# Altium PCB LeftBar1.PcbDoc
Units mil, origin at the board's own origin, x right, y up, seen from the top; angles counter-clockwise.
Board outline 11815 x 1400.01 mil, 2 copper layers (Top Layer, Bottom Layer); 10 components, 12 nets, 68 pads, 11 vias.
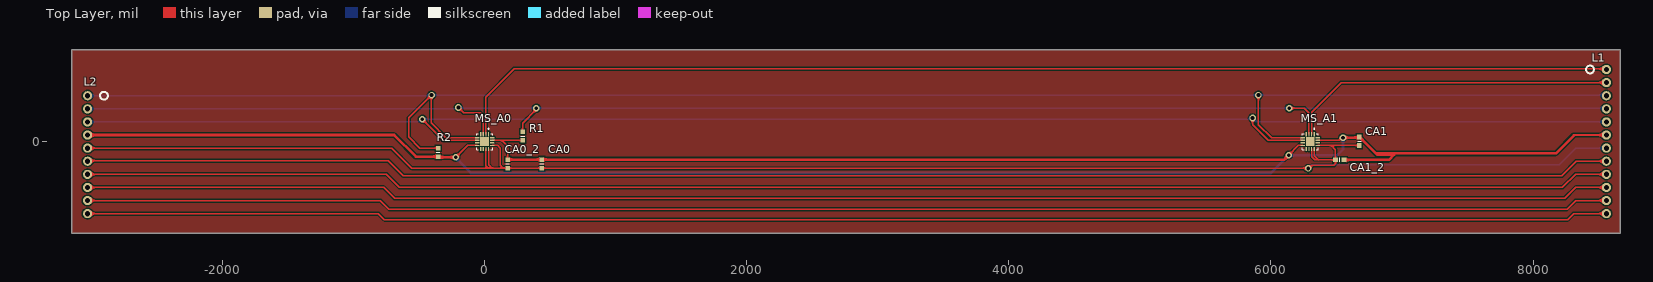
[diagram p0: Top Layer view]
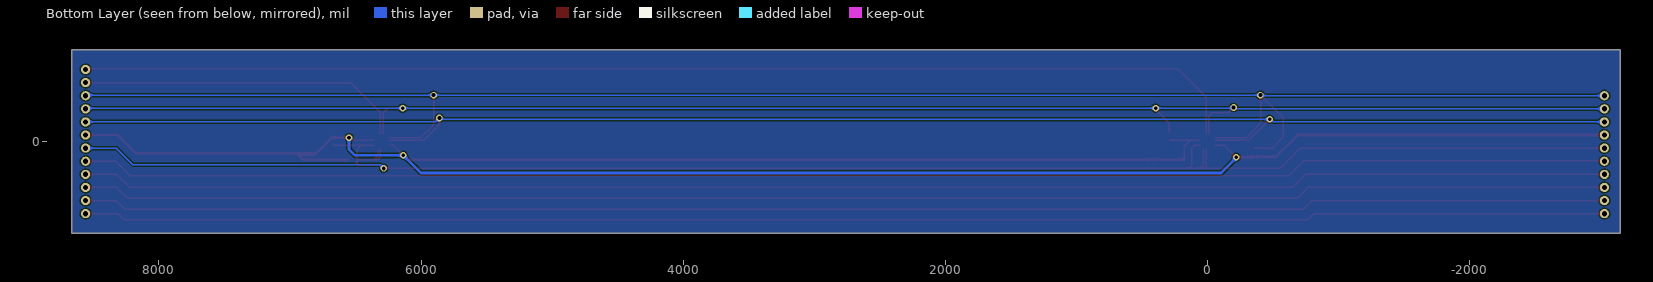
[diagram p1: Bottom Layer view, seen from below]
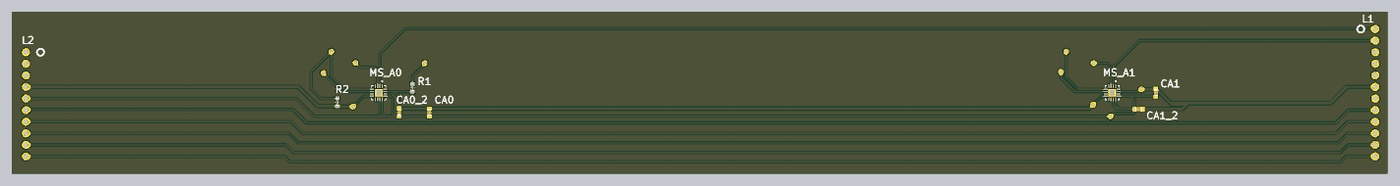
[diagram p2: 3D render of the assembled board from above, using the file's embedded part models]

## Layer stack, top to bottom
Top Solder: solder mask 0.4, Solder Resist, Dk 3.5
Top Layer: signal copper 1.4
Dielectric 1: dielectric 12.6, FR-4, Dk 4.8
Bottom Layer: signal copper 1.4
Bottom Solder: solder mask 0.4, Solder Resist, Dk 3.5

## Board outline
-3150,-700 -3150,700 8665,700 8665,-700 8665,-700.01

## Design rules (kind name [scope] priority, off if disabled: settings)
Clearance [All] p1: gap=10 ignorepadtopadclearanceinfootprint=FALSE except(0: Arc-Hole Track-Hole SMDPad-Hole THPad-Hole Via-Hole Fill-Hole Poly-Hole Region-Hole Text-Hole)
PolygonConnect [All] p1: connectstyle=Relief reliefconductorwidth=10 reliefentries=4 polygonreliefangle="90 Angle" airgapwidth=10
RoutingVias [All] p1: holewidth=28 width=50 viastyle="Through Hole" minholewidth=28 minwidth=50 maxholewidth=28 maxwidth=50
SolderMaskExpansion [All] p1: expansion=4 istentingtop=FALSE
Width [All] p1: maxlimit=20 minlimit=15 preferedwidth=15
30 further rules are at their usual default settings.

## Components (designator, comment, footprint, x,y, rotation, side; value= is the part's Value field where it differs from the comment)
CA0 "0.1uF" CAP_0603 435,-170 r90 top
CA0_2 "0.1uF" CAP_0603 175,-170 r270 top
CA1 "0.1uF" CAP_0603 6675,2.5 r90 top
CA1_2 "0.1uF" CAP_0603 6525,-140 r180 top
L1 "PIN_left" PIN_LEFT 8560,50 r0 top (schematic designator CON_L_1)
L2 "PIN_left_2" PIN_LEFT_2 -3030,-150 r0 top (schematic designator CON_L_2)
MS_A0 "MLX90393SLW ABA 011 RE" MLX90393 0,0 r270 top
MS_A1 "MLX90393SLW ABA 011 RE" MLX90393 6300,0 r270 top
R1 "10k" RES_0603 290,42.5 r270 top
R2 "10k" RES_0603 -355,-82.5 r270 top

## Footprints (in the part's own frame and the unit in brackets; to place one, negate y for a bottom-side part, rotate by r counter-clockwise, add the part's x,y. Pads: shape width x height; smd on the part's side, far side on the other; paste and mask are expansions set on the pad)
CAP_0603 [mil]
  rect 35x35 smd: 1(-32.5,0) 2(32.5,0)
  silkscreen extent 0,-16 0,14, body extent -53,-18 49,21, height 35
MLX90393 [mm]
  rrect25% 0.86x0.26 smd: 1(-1.435,0.75) 2(-1.435,0.25) 3(-1.435,-0.25) 4(-1.435,-0.75) 9(1.435,-0.75) 10(1.435,-0.25) 11(1.435,0.25) 12(1.435,0.75)
  rrect25% 0.26x0.86 smd: 5(-0.75,-1.435) 6(-0.25,-1.435) 7(0.25,-1.435) 8(0.75,-1.435) 13(0.75,1.435) 14(0.25,1.435) 15(-0.25,1.435) 16(-0.75,1.435)
  rect 1.71x1.71 smd paste-2: 17(0,0)
  silkscreen extent -2.59,-1.55 1.55,1.55
PIN_LEFT [mil]
  round 70 hole 40: 1(0,500) 2(0,400) 3(0,300) 4(0,200) 5(0,100) 6(0,0) 7(0,-100) 8(0,-200) 9(0,-300) 10(0,-400) 11(0,-500) 12(0,-600)
  silkscreen extent -155,470 -95,530
PIN_LEFT_2 [mil]
  round 70 hole 40: 1(0,500) 2(0,400) 3(0,300) 4(0,200) 5(0,100) 6(0,0) 7(0,-100) 8(0,-200) 9(0,-300) 10(0,-400)
  silkscreen extent 95,470 155,530
RES_0603 [mil]
  rect 35x35 smd: 1(-32.5,0) 2(32.5,0)
  silkscreen extent 0,-16 0,14, body extent -34,-16 29,16, height 18

## Part data
CA0 CA0_2 CA1 CA1_2: library part CAP, "Capacitance"
MS_A0 MS_A1: "MLX90393 Sensor"
R1 R2: library part RES, "Resistance"

## Via types
v1: diameter 50, hole 28, Top Layer to Bottom Layer, 11 vias

## Nets (pads, with @x,y where several pads share a name; then routed paths per layer and width w, separated by ;. In a path a pad name is that pad's centre, name@x,y a point inside that pad or via, vN(x,y) a via of type N, cw(c..) or ccw(c..) an arc to the next point about the centre after c; other vN are vias at no path point)
16: L1.12 L2.10 | length 11627.3
  Top Layer w10: L2.10 -2930,-550 -810,-550 -765,-595 8265,-595 8310,-550 L1.12
A0: L1.1 MS_A0.2 | length 8922.6
  Top Layer w10: MS_A0.2 9.84,339.84 225,555 L1.1@8560,555
A1: L1.2 MS_A1.2 | length 2511.8
  Top Layer w10: MS_A1.2 6309.84,224.84 6535,450 8205,450 L1.2
A2: L1.8 L2.6 | length 11683.2
  Top Layer w10: L2.6@-3030,-145 -735,-145 -620,-260 8220,-260 8330,-150 L1.8
A3: L1.9 L2.7 | length 11672.8
  Top Layer w10: L2.7 -2930,-250 -750,-250 -650,-350 8225,-350 8325,-250 L1.9
A4: L1.10 L2.8 | length 11658.3
  Top Layer w10: L2.8 -2930,-350 -770,-350 -687.5,-432.5 8242.5,-432.5 8325,-350 L1.10
A5: L1.11 L2.9 | length 11643.8
  Top Layer w10: L2.9 -2930,-450 -795,-450 -730,-515 8260,-515 8325,-450 L1.11
GND: CA0.1 CA0_2.2 CA1.1 CA1_2.2 L1.7 L2.5 MS_A0.11 MS_A0.12 MS_A0.13 MS_A1.11 MS_A1.12 MS_A1.13 | length 13304.2
  Top Layer w10: L2.5 -710,-50 -557.5,-202.5 27.5,-202.5 ; MS_A0.11 9.84,-184.84 27.5,-202.5 ; MS_A0.12 29.53,-177.03 55,-202.5 ; MS_A0.13 99.53,-29.53 120,-50 120,-182.5 140,-202.5 ; v1@6285,-210 6315,-180 6480,-180 6492.5,-167.5 CA1_2.2 ; v1(6285,-205) 6284.52,-205.48 6280.48,-205.48 6277.5,-202.5 CA0.1 CA0_2.2 140,-202.5 ; MS_A1.11 6309.84,-114.84 6335,-140 6360,-140 ; MS_A1.12 6329.53,-109.53 6360,-140 ; MS_A1.13 6459.53,-29.53 ; CA1.1@6675,-29.53 6459.53,-29.53 ; 27.5,-202.5 55,-202.5 ; 55,-202.5 140,-202.5 ; 6360,-140 CA1_2.2 ; 6459.53,-29.53 6492.5,-62.5 CA1_2.2
  Bottom Layer w10: v1(6285,-205) 6315,-175 8200,-175 8325,-50 L1.7
MISO: L1.5 L2.3 MS_A0.6 MS_A1.6 | length 12583.1
  Top Layer w10: v1(-475,170) -314.96,9.96 MS_A0.6@-56.5,9.96 ; v1(5860,180) 5860,130 5980,10 5996.72,10 5997.31,9.41 MS_A1.6@6243.5,9.41
  Bottom Layer w10: L2.3 -500.86,150 -480.86,170 v1(-475,170) 5850,170 v1(5860,180) 5890,150 L1.5
MOSI: L1.3 L2.1 MS_A0.5 MS_A1.5 R2.1 | length 13457.5
  Top Layer w10: v1(-405,355) v1@-407.5,352.5 ; R2.1 -495,-50 -580,35 -580,180 v1@-407.5,352.5 ; MS_A0.5@-56.5,29.96 -294.96,29.96 -407.5,142.5 v1@-407.5,352.5 ; v1(5905,355) 5905,130 6005.47,29.53 MS_A1.5
  Bottom Layer w10: L2.1 -410,350 v1(-405,355) v1(5905,355) L1.3@8560,355
SCL: L1.4 L2.2 MS_A0.3 MS_A1.3 R1.1 | length 12513.3
  Top Layer w10: v1(-200,260) -160,220 -35.16,220 -10.16,195 MS_A0.3@-10.16,56.5 ; R1.1@290,64.74 R1.1 290,140 395,245 v1(395,255) ; v1(6140,255) 6255,255 6290.16,219.84 MS_A1.3
  Bottom Layer w10: L2.2 -225.86,250 -223.51,252.35 -207.65,252.35 v1(-200,260) -195,255 v1(395,255) v1(6140,255) L1.4@8560,255
VCC: CA0.2 CA0_2.1 CA1.2 CA1_2.1 L1.6 L2.4 MS_A0.8 MS_A0.15 MS_A1.8 MS_A1.15 R1.2 R2.2 | length 19447.6
  Top Layer w10: v1(-220,-120) -129.53,-29.53 MS_A0.8 ; MS_A0.15 130,9.84 ; CA0_2.1 175,-35.16 130,9.84 ; R1.2@290,9.84 130,9.84 ; v1(6135,-105) 6210.47,-29.53 MS_A1.8 ; MS_A1.15 6519.02,9.84 6539.18,30 v1(6550,30) ; CA1.2@6670,30 CA1.2
  Top Layer w15: 8308.75,50 L1.6
  Top Layer w20: L2.4 -2823.85,50 -690,50 -525,-115 R2.2 ; R2.2@-355,-120 v1(-220,-120) ; CA0_2.1 CA0.2 6102.5,-137.5 v1(6135,-105) ; v1(6550,30) CA1.2@6670,30 ; CA1_2.1 6900,-140 6940,-100 6810,-100 6800,-90 ; CA1.2 6800,-90 ; 8311.25,47.5 8173.75,-90 6800,-90
  Bottom Layer w10: v1@-220,-125 v1(-220,-120)
  Bottom Layer w20: v1@-220,-125 -105,-240 6000,-240 v1(6135,-105) 6505,-105 6550,-60 v1(6550,30)
pads on no net: MS_A0.1 MS_A0.4 MS_A0.7 MS_A0.9 MS_A0.10 MS_A0.14 MS_A0.16 MS_A0.17 MS_A1.1 MS_A1.4 MS_A1.7 MS_A1.9 MS_A1.10 MS_A1.14 MS_A1.16 MS_A1.17

## Polygon pours and split planes (outlines as drawn)
no net on Top Layer "NONET_L01_P030" (solid, pour order 30): -3150,700 -3150,-700 8665,-700 8665,700
no net on Top Layer "NONET_L01_P025" (solid, pour order 25): -3149.36,669.24
no net on Top Layer "NONET_L01_P017" (solid, pour order 17): -3149.36,669.24
no net on Top Layer "NONET_L01_P016" (solid, pour order 16): -3149.36,669.24
no net on Top Layer "NONET_L01_P011" (solid, pour order 11): -2925,715
no net on Top Layer "NONET_L01_P008" (solid, pour order 8): 8580,655
no net on Top Layer "NONET_L01_P002" (solid, pour order 2): -3335,610
no net on Top Layer "NONET_L01_P001" (solid, pour order 1): -3155,-845
no net on Top Layer "NONET_L01_P000" (solid, pour order 0): -3170,55
no net on Bottom Layer "NONET_L02_P031" (solid, pour order 31): -3150,700 -3150,-700 8665,-700 8665,700
no net on Bottom Layer "NONET_L02_P029" (solid, pour order 29): -3170,690
no net on Bottom Layer "NONET_L02_P024" (solid, pour order 24): -3150,670
no net on Bottom Layer "NONET_L02_P006" (solid, pour order 6): -2225,1285
no net on Bottom Layer "NONET_L02_P005" (solid, pour order 5): -2705,990

## Silkscreen, mask and mechanical layers (free items; w line width, h text height)
Mechanical 1:
  lines w10: -3150,-700.01 8665,-700.01 8665,700 -3135,700 -3150,700 -3150,-700